# Altium PCB 调压部分Linear AC to DC.PcbDoc
Units mm, origin at the board's own origin, x right, y up, seen from the top; angles counter-clockwise.
Board outline 100 x 75 mm, 2 copper layers (Top Layer, Bottom Layer); 21 components, 0 nets, 72 pads, 0 vias.
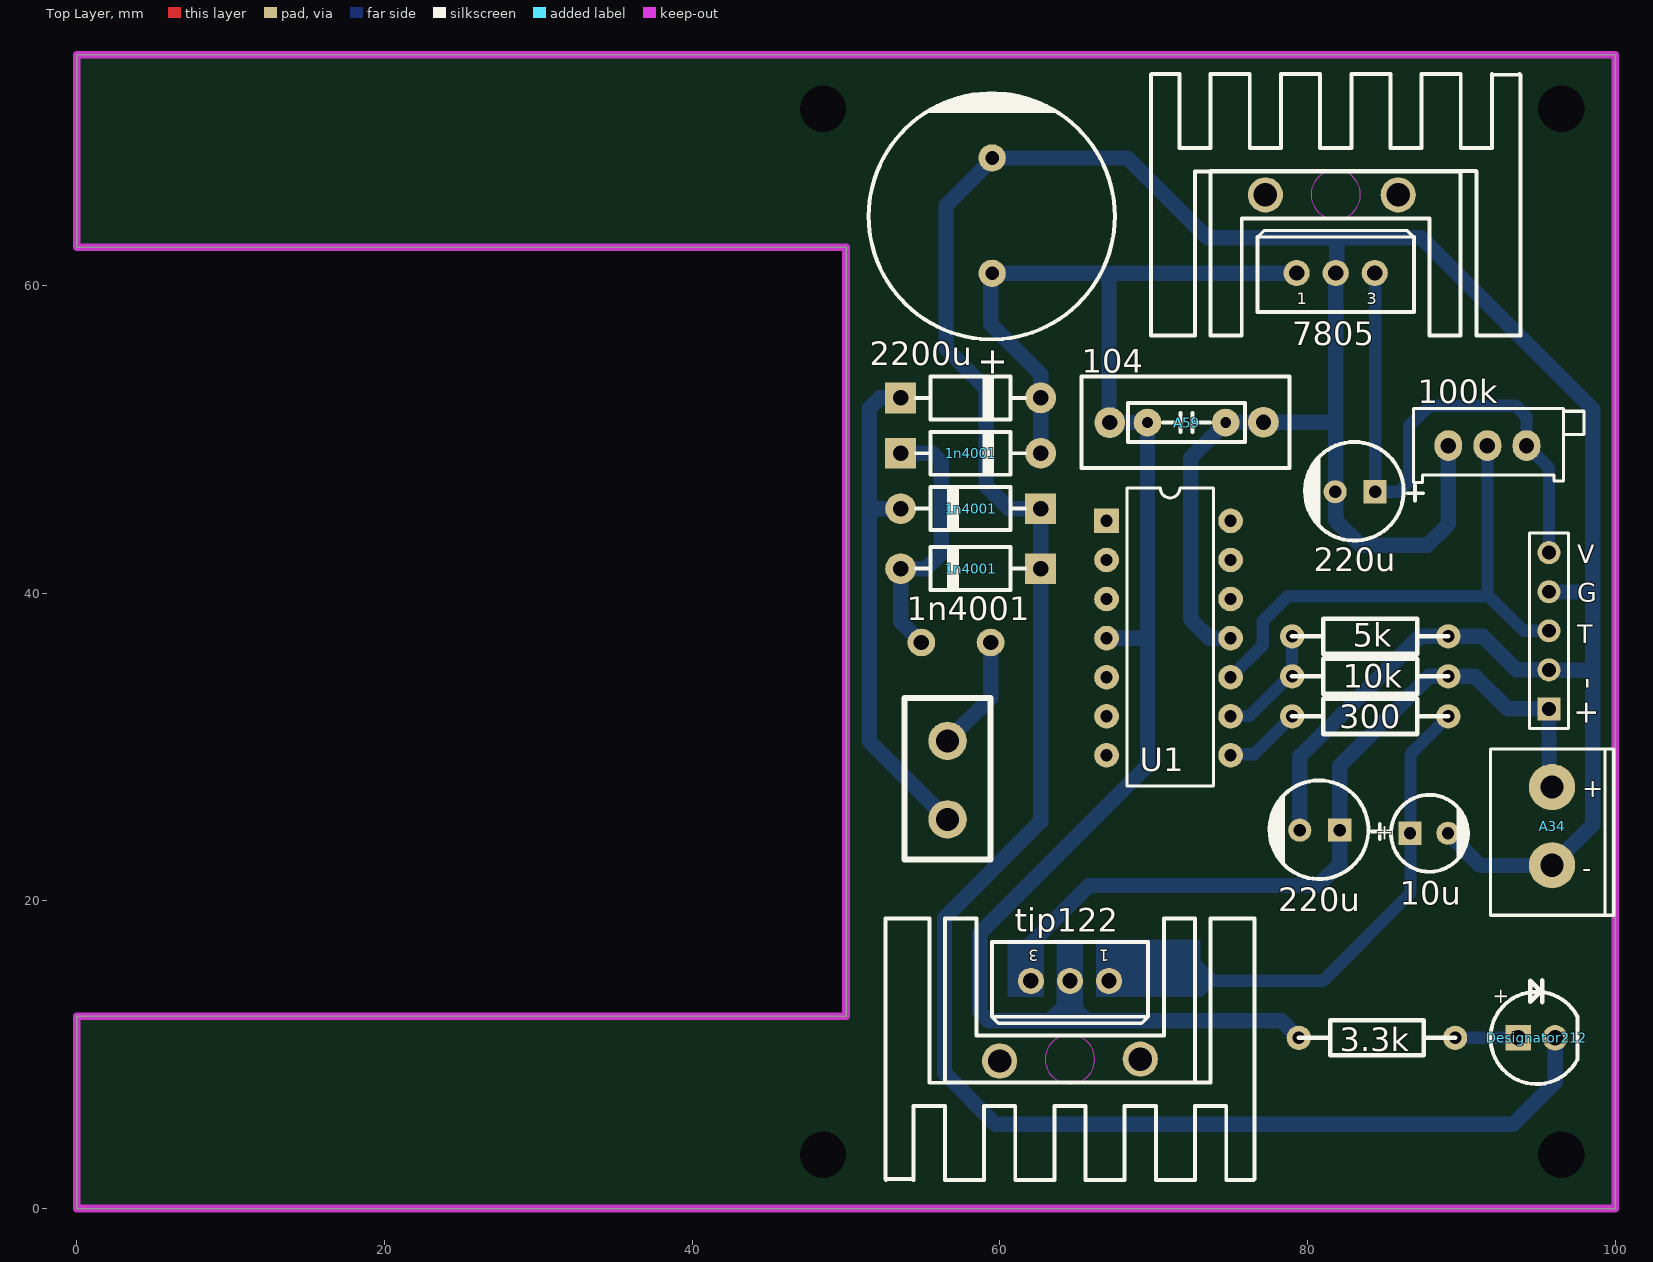
[diagram p0: Top Layer view]
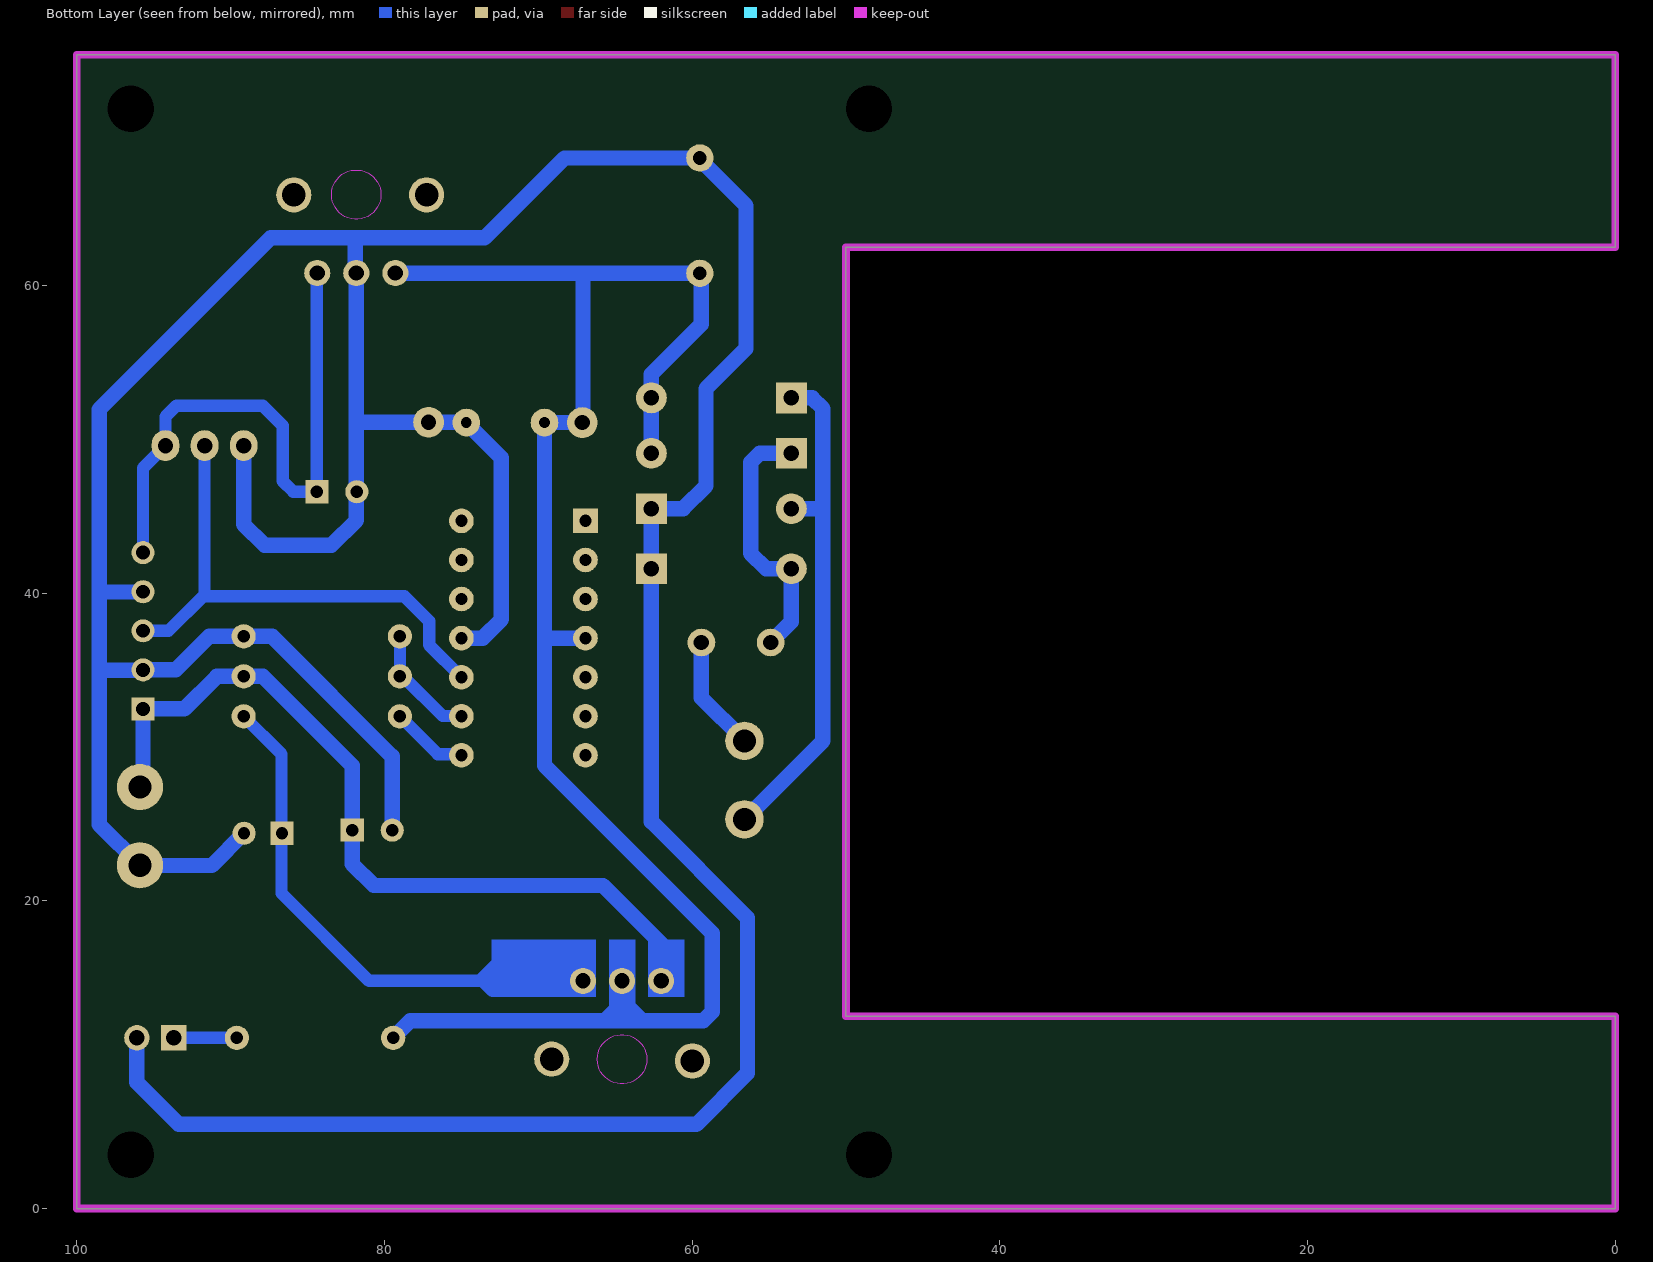
[diagram p1: Bottom Layer view, seen from below]

## Layer stack, top to bottom
Top Solder: solder mask 0.0102, Solder Resist, Dk 3.5
Top Layer: signal copper 0.0356
Dielectric 1: dielectric 0.32, FR-4, Dk 4.8
Bottom Layer: signal copper 0.0356
Bottom Solder: solder mask 0.0102, Solder Resist, Dk 3.5

## Board outline
0,0 0,12.5 50,12.5 50,62.5 0,62.5 0,75 100,75 100,0

## Design rules (kind name [scope] priority, off if disabled: settings)
Clearance [All] p1: gap=0.254 ignorepadtopadclearanceinfootprint=FALSE except(0: Arc-Hole Track-Hole SMDPad-Hole THPad-Hole Via-Hole Fill-Hole Poly-Hole Region-Hole Text-Hole)
ComponentClearance [All] p1 off: gap=0.254 collisioncheckmode=3 verticalgap=0.254 showdistances=FALSE
Height [All] p1 off: minheight=0 maxheight=25.4 prefheight=12.7
PolygonConnect [All] p1: connectstyle=Relief reliefconductorwidth=0.254 reliefentries=4 polygonreliefangle="90 Angle" airgapwidth=0.254
RoutingVias [All] p1: holewidth=0.5 width=1 viastyle="Through Hole" minholewidth=0.3 minwidth=0.5 maxholewidth=0.1 maxwidth=1.2
SolderMaskExpansion [All] p1: expansion=0.102 istentingtop=FALSE
Width [All] p1: maxlimit=1 minlimit=0.8 preferedwidth=0.8
28 further rules are at their usual default settings.

## Components (designator, comment, footprint, x,y, rotation, side; value= is the part's Value field where it differs from the comment)
1n4001 "Comment" DO-41 58.1,49.1 r0 top
1n4001 "Comment" DO-41 58.1,52.7 r0 top
1n4001 "Comment" DO-41 58.1,41.6 r180 top
1n4001 "Comment" DO-41 58.1,45.5 r180 top
3.3k "Comment" AXIAL0.4 89.6,11.1 r180 top
5k "Comment" AXIAL0.4 79,37.2 r0 top
10k "Comment" AXIAL0.4 79,34.6 r0 top
10u "Comment" C5X8 87.9,24.4 r0 top
100k "Comment" 3296X 91.679,49.599 r180 top
104 "Comment" X2-10MM 72.14,51.113 r180 top
220u "Comment" C6X8 80.8,24.6 r180 top
220u "Comment" C6X8 83.1,46.6 r180 top
300 "Comment" AXIAL0.4 79,32 r0 top
2200u "Comment" C16X25 59.5,64.55 r270 top
7805 "Comment" TO-220-LM#1 79.296,60.82 r0 top
"+ -" "Comment" HDR1X5 95.7,32.48 r90 top
A34 "Comment" 2PIN-5.08A 95.9,27.4 r270 top
A59 "Comment" MLCC5.08-A 72.14,51.1 r180 top
Designator212 "Comment" LED5MM-RED 94.9,11.1 r270 top
tip122 "Comment" TO-220-LM#2 67.1,14.8 r180 top
U1 "Comment" DIP14 66.938,44.705 r0 top

## Footprints (in the part's own frame and the unit in brackets; to place one, negate y for a bottom-side part, rotate by r counter-clockwise, add the part's x,y. Pads: shape width x height; smd on the part's side, far side on the other; paste and mask are expansions set on the pad)
2PIN-5.08A [mm]
  round 3 hole 1.5: 1(0,0) 2(5.08,0)
  silkscreen extent -2.49,-3.99 8.33,4.01, body extent -2.54,-5.2 8.36,4.6, height 14.2
3296X [mm]
  oval 1.8x2 hole 1: 1(-2.561,-0.001) 2(-0.021,-0.001) 3(2.519,-0.001)
  silkscreen extent -6.31,-2.4 4.78,2.4, body extent -6.3,-2.42 4.75,2.41, height 10.03
AXIAL0.4 [mil] "此模型引用\"王千会\"作品，特此声明"
  round 62 hole 32: 1(0,0) 2(400,0)
  silkscreen extent 0,-45 400,45, body extent -13,-47 413,47, height 101
C5X8 [mm] "RB.1/.2"
  rect 1.5x1.5 hole 0.8: 1(-1.231,0)
  round 1.5 hole 0.8: 2(1.231,0)
  silkscreen extent -2.47,-2.5 2.53,2.5, body extent -2.5,-2.5 2.5,2.49, height 8.13
C6X8 [mm]
  rect 1.5x1.5 hole 0.8: 1(-1.3,0)
  round 1.5 hole 0.8: 2(1.3,0)
  silkscreen extent -4.4,-3.24 3.26,3.18, body extent -3.15,-3.2 3.2,3.15, height 7.53
C16X25 [mil]
  round 70 hole 35: 1(147.64,0) 2(-147.64,0)
  silkscreen extent -313,-316 316,314, body extent -313,-317 317,313, height 984
DIP14 [mm]
  rect 1.6x1.6 hole 0.8: 1(0,0)
  round 1.6 hole 0.8: 2(0,-2.54) 3(0,-5.08) 4(0,-7.62) 5(0,-10.16) 6(0,-12.7) 7(0,-15.24) 8(8.062,-15.24) 9(8.062,-12.7) 10(8.062,-10.16) 11(8.062,-7.62) 12(8.062,-5.08) 13(8.062,-2.54) 14(8.062,0)
  silkscreen extent 1.32,-17.22 6.96,2.13, body extent 0.1,-17.12 7.98,1.93, height 4.19
DO-41 [mm] "2.6*9.1mm(直径，脚距）"
  rect 2x2 hole 1: 1(-4.55,0)
  round 2 hole 1: 2(4.55,0)
  silkscreen extent -3.56,-1.4 3.56,1.4, body extent -4.92,-1.29 4.98,1.31, height 2.65
HDR1X5 [mm] "Connector; Header; 5 Position"
  rect 1.5x1.5 hole 0.9: 1(0,0)
  round 1.5 hole 0.9: 2(2.54,0) 3(5.08,0) 4(7.62,0) 5(10.16,0)
  silkscreen extent -1.27,-1.27 11.43,1.27, body extent -1.27,-1.27 11.43,1.27, height 10.1
LED5MM-RED [mm]
  rect 1.65x1.651 hole 1.016 mask+0.03: 1(0,-1.2)
  oval 1.65x1.651 hole 1.016 mask+0.03: 2(0,1.2)
  silkscreen extent -3.73,-3 3.01,2.65, body extent -2.85,-2.89 2.85,2.46, height 8.6
MLCC5.08-A [mm] "独石电容，脚距5.08mm"
  round 1.8 hole 0.7: 1(-2.54,0) 2(2.54,0)
  silkscreen extent -3.81,-1.27 3.81,1.27, body extent -2.79,-1 2.79,1, height 3.71
TO-220-LM#1 [mm]
  round 1.7 hole 1: 1(0,0) 2(2.54,0) 3(5.08,0)
  round 2.286 hole 1.524: 4(-2.032,5.08) 5(6.604,5.08)
  Keep-Out Layer circle w0.025: c2.545,5.094 r1.606
  silkscreen extent -9.46,-4.06 14.54,12.94, body extent -5.96,-5.77 11.04,4.45, height 21.07
TO-220-LM#2 [mm]
  round 1.7 hole 1: 1(0,0) 2(2.54,0) 3(5.08,0)
  round 2.286 hole 1.524: 4(-2.032,5.08) 5(7.112,5.207)
  Keep-Out Layer circle w0.025: c2.545,5.094 r1.606
  silkscreen extent -9.46,-4.06 14.54,12.94, body extent -5.96,-5.77 11.04,4.45, height 21.07
X2-10MM [mm] "18.25MM*11.4MM*5.78MM0.1UF 脚距15MM"
  round 2 hole 1: 1(-5,-0.013) 2(5,0.013)
  silkscreen extent -6.7,-2.98 6.84,2.96, body extent -6.5,-2.49 6.5,2.51, height 12

## Free pads (board coordinates)
  round 0.1 hole 3: 2(96.5,71.5) 3(96.5,3.5) 6(48.5,71.5) 7(48.5,3.5)
  round 2.5 hole 1.5: 4(56.6,30.4) 5(56.6,25.3)
  round 1.8 hole 1: ""(54.9,36.8) ""(59.4,36.8)

## Nets (pads, with @x,y where several pads share a name; then routed paths per layer and width w, separated by ;. In a path a pad name is that pad's centre, name@x,y a point inside that pad or via, vN(x,y) a via of type N, cw(c..) or ccw(c..) an arc to the next point about the centre after c; other vN are vias at no path point)
pads on no net: 1n4001.1 1n4001.2 3.3k.1 3.3k.2 5k.1 5k.2 10k.1 10k.2 10u.1 10u.2 100k.1 100k.2 100k.3 104.1 104.2 220u.1 220u.2 300.1 300.2 2200u.1 2200u.2 7805.1 7805.2 7805.3 7805.4 7805.5 "+ -.1" "+ -.2" "+ -.3" "+ -.4" "+ -.5" A34.1 A34.2 A59.1 A59.2 Designator212.1 Designator212.2 tip122.1 tip122.2 tip122.3 tip122.4 tip122.5 U1.1 U1.2 U1.3 U1.4 U1.5 U1.6 U1.7 U1.8 U1.9 U1.10 U1.11 U1.12 U1.13 U1.14
copper on no net: | length 636.9
  Top Layer w0.8: 78.921,31.921 78.921,31.981 ; 78.945,34.545 79,34.6
  Top Layer w1: 74.915,37 75,37.085
  Bottom Layer w0.8: 67.1,14.8 81,14.8 86.7,20.5 86.7,24.369 86.669,24.4 86.7,24.431 86.7,29.54 89.16,32 ; 72.75,15.875 73.825,14.8 73.625,14.8 72.975,14.15 ; 75,29.465 75.067,29.531 76.531,29.531 79,32 ; 75,32.005 75.012,32.017 76.217,32.017 78.8,34.6 79,34.6 79,37.2 ; 75,34.545 77.1,36.645 77.1,38.2 78.7,39.8 91.7,39.8 ; 84.398,49.4 84.398,60.731 ; 84.4,49.4 84.4,46.6 85.925,46.6 86.625,47.3 86.625,50.9 87.925,52.2 93.525,52.2 94.24,51.485 94.24,49.6 95.7,48.14 95.7,42.64 ; 89.6,11.1 93.7,11.1 ; 91.7,49.585 91.7,39.8 ; 95.681,35.039 95.7,35.02 ; 95.7,37.56 94.04,37.56 91.8,39.8 91.7,39.8
  Bottom Layer w1: 53.55,45.5 51.8,45.5 51.5,45.8 ; 53.55,49.1 55.614,49.1 56.2,48.514 56.2,42.6 55.2,41.6 53.55,41.6 53.55,38.15 54.9,36.8 ; 53.55,52.7 52.2,52.7 51.5,52 51.5,45.8 ; 56.6,25.3 51.5,30.4 51.5,45.8 ; 56.678,30.478 59.4,33.2 59.4,36.8 ; 59.5,60.8 67.1,60.8 79.276,60.8 79.296,60.82 ; 59.529,60.579 59.4,60.45 59.4,57.5 62.65,54.25 62.65,52.7 62.65,52.1 62.65,49.1 ; 62.02,14.8 62.02,17.22 65.8,21 80.7,21 82.1,22.4 82.1,24.6 82.1,28.8 87.9,34.6 89.16,34.6 90.9,34.6 93.02,32.48 95.7,32.48 95.7,27.3 ; 64.55,14.9 64.468,14.818 64.468,13.443 ; 64.56,14.8 64.6,14.76 ; 65.182,12.2 63.225,12.2 ; 65.269,12.2 78.34,12.2 79.44,11.1 ; 65.712,12.2 64.468,13.443 ; 66.938,37.085 69.385,37.085 ; 67.1,51.1 67.1,60.6 ; 67.14,51.1 69.6,51.1 69.6,37 69.6,28.8 58.7,17.9 58.7,12.786 59.286,12.2 63.225,12.2 ; 75,37.085 73.615,37.085 72.4,38.3 72.4,48.8 74.69,51.09 74.725,51.125 77.14,51.125 81.8,51.125 ; 79.5,24.6 79.5,29.4 87.3,37.2 89.16,37.2 91.4,37.2 93.561,35.039 95.681,35.039 ; 81.836,60.82 81.836,52.5 81.836,51.125 81.836,46.6 81.836,44.739 83.45,43.125 87.8,43.125 89.16,44.485 89.16,49.6 ; 81.9,60.82 81.9,63 ; 89.131,24.4 91.231,22.3 95.88,22.3 ; 95.7,35.02 95.72,35 98.1,35 ; 95.7,40.1 95.716,40.084 98.425,40.084 ; 95.9,22.32 98.55,24.97 98.55,34.95 98.55,40.084 98.55,51.95 87.4,63.1 81.9,63.1 73.5,63.1 68.3,68.3 59.5,68.3 59.5,68.2 56.5,65.2 56.5,55.9 59.1,53.3 59.1,46.986 60.586,45.5 62.65,45.5 62.65,41.6 62.65,39.6 62.65,37 62.65,34.2 62.65,25.15 56.4,18.9 56.4,8.8 59.725,5.475 93.375,5.475 96.1,8.2 96.1,11.1 ; 63.225,12.2 64.468,13.443

## Keep-outs
Keep-Out Layer:
  the board outline again, w0.5

## Other copper
Top Layer:
  region: 89.16,49.6
Bottom Layer:
  rectangle: 63.7,12.3 65.4,17.5
  rectangle: 66.25,13.75 73.05,17.5
  rectangle: 60.5,13.75 62.875,17.5

## Silkscreen, mask and mechanical layers (free items; w line width, h text height)
Top Overlay:
  lines w0.4: 53.8,22.7 53.8,33.2 59.4,33.2 59.4,22.7 53.8,22.7
  text "V" at 97.554,41.954 h1.2
  text "G" at 97.554,39.454 h1.2
  text "T" at 97.554,36.754 h1.2
  text "+" at 97.854,26.754 h1.2
  text "-" at 97.854,21.554 h1.2
Mechanical 1:
  circle w0.254: c22.5,68.9 r2
  circle w0.254: c22.5,6.1 r2
  lines w0.2: 4,5.4 cw(c4.55,5.95) 4,6.5 16,6.5 cw(c15.45,5.95) 16,5.4 4,5.4 ; 4,68.4 cw(c4.55,68.95) 4,69.5 16,69.5 cw(c15.45,68.95) 16,68.4 4,68.4 ; 29,5.4 cw(c29.55,5.95) 29,6.5 41,6.5 cw(c40.45,5.95) 41,5.4 29,5.4 ; 29,68.4 cw(c29.55,68.95) 29,69.5 41,69.5 cw(c40.45,68.95) 41,68.4 29,68.4
  lines w0.4: 0,0 0,12.5 50,12.5 50,62.5 0,62.5 0,75 100,75 100,0 0,0

## Text inside footprints (layer, text, board x,y; h text height)
10u: Top Overlay "+" at 84.432,23.968 h1.02
2200u: Top Overlay "+" at 58.789,56.025 h1.75 r270
7805: Top Overlay "1" at 79.296,58.788 h0.76; Top Overlay "3" at 83.868,58.788 h0.76
Designator212: Top Overlay "+" at 92.177,14.368 h1 r270
tip122: Top Overlay "1" at 67.1,16.832 h0.76 r180; Top Overlay "3" at 62.528,16.832 h0.76 r180